# EAGLE board medi_dense_6_cpx (EAGLE 6.0)

Size 39.62 x 33.02 mm. Coordinates in mm from the lower left corner, seen from the top.
Outline: 0,0 0,33.02 39.62,33.02 39.62,0 0,0
Copper layers (1*16): Top 0.035mm / dielectric 1.5mm / Bottom 0.035mm
Design rules: minimum track width 10mil, minimum drill 24mil, track to track 8mil, track to pad 8mil, pad to pad 8mil, via to via 8mil, smd to smd 8mil, copper to edge 40mil, drill to drill 8mil, minimum pad ring 10mil, minimum via ring 8mil, stop-mask expansion 4mil, vias tented up to drill 0mil, thermal gap 10mil
Holes 3.2 mm at 6.6,6.6 6.6,26.42 33.02,6.6 33.02,26.42

## Footprints (pad centres in the part's own frame; a part is rotated, then mirrored left to right if it is on the bottom)
LED5MM = drill 0.813 octagon: A -1.27,0; K 1.27,0
1X01 = drill 1.016 octagon: 1 0,0

## Placement (x,y rotation side)
00  [LED5MM]  3.3,3.3 0 top
01  [LED5MM]  9.91,3.3 0 top
02  [LED5MM]  16.51,3.3 0 top
03  [LED5MM]  23.11,3.3 0 top
04  [LED5MM]  29.72,3.3 0 top
05  [LED5MM]  36.32,3.3 0 top
10  [LED5MM]  3.3,9.91 0 top
11  [LED5MM]  9.91,9.91 0 top
12  [LED5MM]  16.51,9.91 0 top
13  [LED5MM]  23.11,9.91 0 top
14  [LED5MM]  29.72,9.91 0 top
15  [LED5MM]  36.32,9.91 0 top
20  [LED5MM]  3.3,16.51 0 top
21  [LED5MM]  9.91,16.51 0 top
22  [LED5MM]  16.51,16.51 0 top
23  [LED5MM]  23.11,16.51 0 top
24  [LED5MM]  29.72,16.51 0 top
25  [LED5MM]  36.32,16.51 0 top
30  [LED5MM]  3.3,23.11 0 top
31  [LED5MM]  9.91,23.11 0 top
32  [LED5MM]  16.51,23.11 0 top
33  [LED5MM]  23.11,23.11 0 top
34  [LED5MM]  29.72,23.11 0 top
35  [LED5MM]  36.32,23.11 0 top
40  [LED5MM]  3.3,29.72 0 top
41  [LED5MM]  9.91,29.72 0 top
42  [LED5MM]  16.51,29.72 0 top
43  [LED5MM]  23.11,29.72 0 top
44  [LED5MM]  29.72,29.72 0 top
45  [LED5MM]  36.32,29.72 0 top
H0  [1X01]  13.46,6.6 0 top
H1  [1X01]  16,6.6 0 top
H2  [1X01]  18.54,6.6 0 top
H3  [1X01]  21.08,6.6 0 top
H4  [1X01]  23.62,6.6 0 top
H5  [1X01]  26.16,6.6 0 top

## Library data of the parts
00 01-05 10-15 20-25 30-35 40-45 = led
H0 H1-H5 = pinhead

## Nets
D: 00.A 05.K 11.A 15.K 22.A 25.K 33.A 35.K 44.A 45.K H5.1
S0: 00.K 01.A 02.A 03.A 04.A 05.A 10.K 20.K 30.K 40.K H0.1
S1: 01.K 10.A 11.K 12.A 13.A 14.A 15.A 21.K 31.K 41.K H1.1
S2: 02.K 12.K 20.A 21.A 22.K 23.A 24.A 25.A 32.K 42.K H2.1
S3: 03.K 13.K 23.K 30.A 31.A 32.A 33.K 34.A 35.A 43.K H3.1
S4: 04.K 14.K 24.K 34.K 40.A 41.A 42.A 43.A 44.K 45.A H4.1

## Tracks (layer width: path | path; a pad name or v marks a point on that pad's centre or on a via)
D  (10 unrouted)
S0  (10 unrouted)
S1  (10 unrouted)
S2  (10 unrouted)
S3  (10 unrouted)
S4  (10 unrouted)